# EAGLE board RC2014 I2C Bus Supervisor (EAGLE 7.1.0)
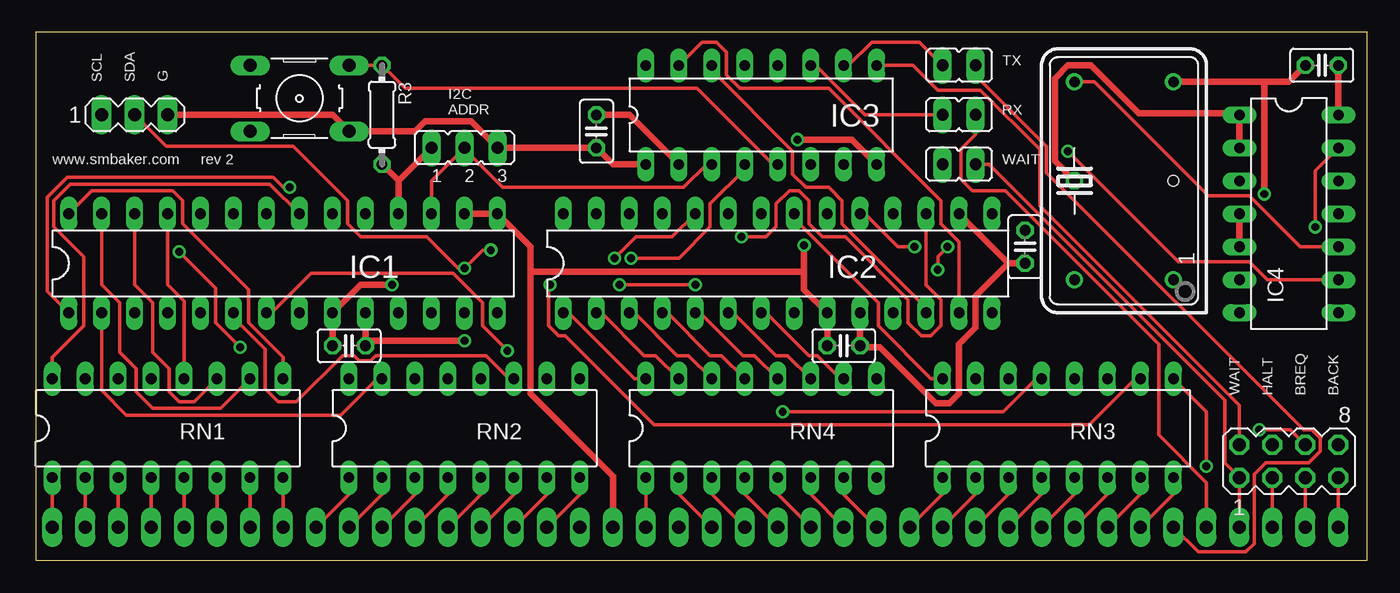
[diagram p0: board, top side]
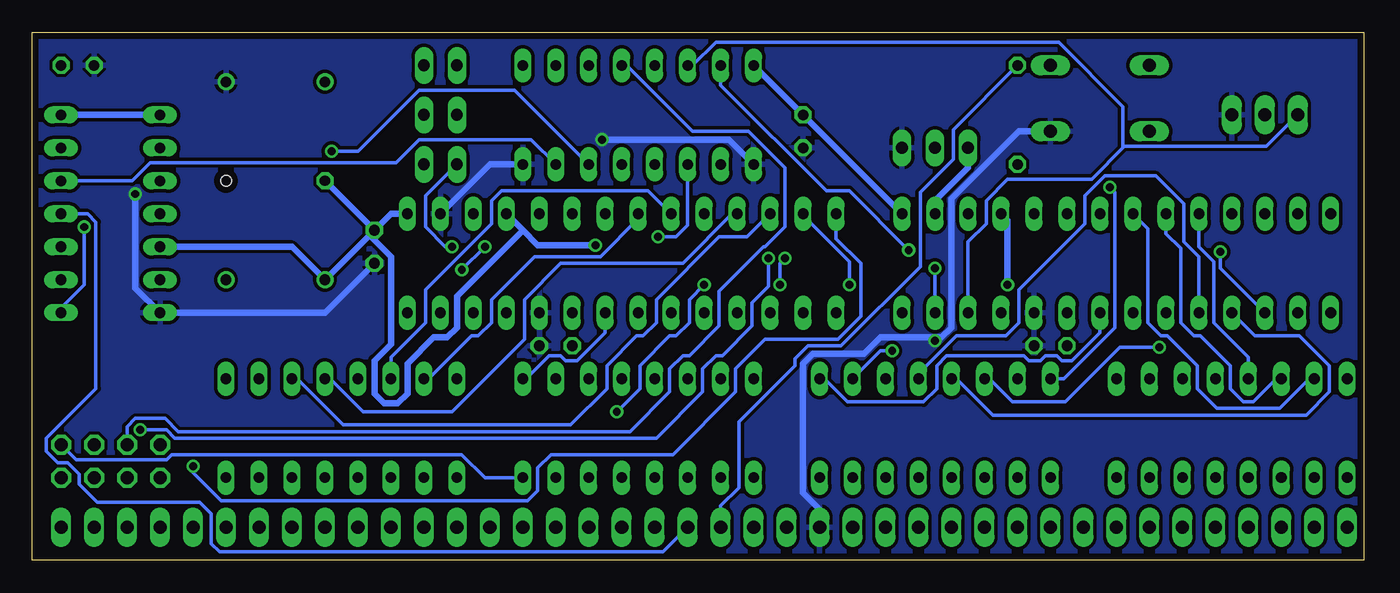
[diagram p1: board, bottom side, seen from below]

Size 102.54 x 40.63 mm. Coordinates in mm from the lower left corner, seen from the top.
Outline: 0,0 102.54,0 102.54,40.63 0,40.63 0,0
Copper layers (1*16): Top 0.035mm / dielectric 1.5mm / Bottom 0.035mm
Design rules "default *": minimum track width 10mil, minimum drill 24mil, track to track 10mil, track to pad 10mil, pad to pad 10mil, via to via 10mil, smd to smd 8mil, copper to edge 20mil, drill to drill 8mil, minimum pad ring 10mil, minimum via ring 8mil, stop-mask expansion 4mil, vias tented up to drill 25mil, thermal gap 10mil
Net classes: 1 PWR: width 0.508 mm
Holes 0.81 mm at 87.63,29.21

## Footprints (pad centres in the part's own frame; a part is rotated, then mirrored left to right if it is on the bottom)
C025-025X050 = drill 0.813 octagon: 1 -1.27,0; 2 1.27,0
DIL28-3 = drill 0.813 long: 1 -16.51,-3.81; 2 -13.97,-3.81; 3 -11.43,-3.81; 4 -8.89,-3.81; 5 -6.35,-3.81; 6 -3.81,-3.81; 7 -1.27,-3.81; 8 1.27,-3.81; 9 3.81,-3.81; 10 6.35,-3.81; 11 8.89,-3.81; 12 11.43,-3.81; 13 13.97,-3.81; 14 16.51,-3.81; 15 16.51,3.81; 16 13.97,3.81; 17 11.43,3.81; 18 8.89,3.81; 19 6.35,3.81; 20 3.81,3.81; 21 1.27,3.81; 22 -1.27,3.81; 23 -3.81,3.81; 24 -6.35,3.81; 25 -8.89,3.81; 26 -11.43,3.81; 27 -13.97,3.81; 28 -16.51,3.81
DIL16 = drill 0.813 long: 1 -8.89,-3.81; 2 -6.35,-3.81; 3 -3.81,-3.81; 4 -1.27,-3.81; 5 1.27,-3.81; 6 3.81,-3.81; 7 6.35,-3.81; 8 8.89,-3.81; 9 8.89,3.81; 10 6.35,3.81; 11 3.81,3.81; 12 1.27,3.81; 13 -1.27,3.81; 14 -3.81,3.81; 15 -6.35,3.81; 16 -8.89,3.81
DIL14 = drill 0.813 long: 1 -7.62,-3.81; 2 -5.08,-3.81; 3 -2.54,-3.81; 4 0,-3.81; 5 2.54,-3.81; 6 5.08,-3.81; 7 7.62,-3.81; 8 7.62,3.81; 9 5.08,3.81; 10 2.54,3.81; 11 0,3.81; 12 -2.54,3.81; 13 -5.08,3.81; 14 -7.62,3.81
JP2 = drill 0.914 long: 1 -2.54,0; 2 0,0; 3 2.54,0
JP1 = drill 0.914 long: 1 0,-1.27; 2 0,1.27
DIL14S = drill 0.813: 1 -7.62,-3.81; 7 7.62,-3.81; 8 7.62,3.81; 14 -7.62,3.81
0204/7 = drill 0.813 octagon: 1 -3.81,0; 2 3.81,0
MA03-1 = drill 1.016 long: 1 -2.54,0; 2 0,0; 3 2.54,0
MA04-2 = drill 1.016 octagon: 1 -3.81,-1.27; 2 -3.81,1.27; 3 -1.27,-1.27; 4 -1.27,1.27; 5 1.27,-1.27; 6 1.27,1.27; 7 3.81,-1.27; 8 3.81,1.27
SIP40 = drill 1.016 long: 1 -48.26,0; 2 -45.72,0; 3 -43.18,0; 4 -40.64,0; 5 -38.1,0; 6 -35.56,0; 7 -33.02,0; 8 -30.48,0; 9 -27.94,0; 10 -25.4,0; 11 -22.86,0; 12 -20.32,0; 13 -17.78,0; 14 -15.24,0; 15 -12.7,0; 16 -10.16,0; 17 -7.62,0; 18 -5.08,0; 19 -2.54,0; 20 0,0; 21 2.54,0; 22 5.08,0; 23 7.62,0; 24 10.16,0; 25 12.7,0; 26 15.24,0; 27 17.78,0; 28 20.32,0; 29 22.86,0; 30 25.4,0; 31 27.94,0; 32 30.48,0; 33 33.02,0; 34 35.56,0; 35 38.1,0; 36 40.64,0; 37 43.18,0; 38 45.72,0; 39 48.26,0; 40 50.8,0
BUTTON = drill 1.016 long: 1 -3.81,2.54; 2 3.81,2.54; 3 -3.81,-2.54; 4 3.81,-2.54
SMALL_TP = drill 0.8 octagon: TP 0,0

## Placement (x,y rotation side)
C1  0.1uf  [C025-025X050]  76.2,24.13 270 top
C3  0.1uf  [C025-025X050]  62.23,16.51 0 top
C4  0.1uf  [C025-025X050]  24.13,16.51 0 top
C5  0.1uf  [C025-025X050]  43.18,33.02 270 top
C6  0.1uf  [C025-025X050]  99.06,38.1 180 top
IC1  MCP23017SP  [DIL28-3]  19.05,22.86 0 top
IC2  MCP23017SP  [DIL28-3]  57.15,22.86 0 top
IC3  PCF8574P  [DIL16]  55.88,34.29 0 top
IC4  74HCT00N  [DIL14]  96.52,26.67 270 top
JP1  [JP2]  33.02,31.75 0 top
JP2  [JP1]  71.12,30.48 270 top
JP3  [JP1]  71.12,34.29 270 top
JP4  [JP1]  71.12,38.1 270 top
QG1  [DIL14S]  83.82,29.21 90 top
R3  2.2K  [0204/7]  26.67,34.29 270 top
RN1  [DIL16]  10.16,10.16 0 top
RN2  [DIL16]  33.02,10.16 0 top
RN3  [DIL16]  78.74,10.16 0 top
RN4  [DIL16]  55.88,10.16 0 top
SV1  [MA03-1]  7.62,34.29 0 top
SV3  [MA04-2]  96.52,7.62 0 top
U$1  RC2014  [SIP40]  49.53,2.54 0 top
U$2  BUTTON  [BUTTON]  20.32,35.56 0 top
U$3  SMALL_TP  [SMALL_TP]  80.01,29.21 0 top

## Library data of the parts
C1 C3-C6 R3 = resistor
IC1 IC2 = microchip; MF: MICROCHIP; MPN: MCP23017-E/SP; OC_FARNELL: 1332088; OC_NEWARK: 31K2959
IC3 = micro-philips; MPN: PCF8574PN; OC_FARNELL: 204020; OC_NEWARK: 11N8515
IC4 = 74xx-eu
JP1-JP4 = jumper
QG1 = crystal; OC_FARNELL: unknown; OC_NEWARK: unknown
RN1-RN4 = resistor-dil; OC_FARNELL: unknown; OC_NEWARK: unknown
SV1 SV3 = con-lstb; OC_FARNELL: unknown; OC_NEWARK: unknown
U$1-U$3 = scott

## Nets
+5V [PWR]: C1.1 C3.1 C4.1 C5.1 C6.1 IC1.9 IC1.15 IC1.16 IC1.18 IC2.9 IC2.15 IC2.18 IC3.2 IC3.16 IC4.1 IC4.2 IC4.4 IC4.5 IC4.14 JP1.1 QG1.14 R3.2 U$1.18 U$3.TP
A0: RN2.8 U$1.16
A1: RN2.7 U$1.15
A2: RN2.6 U$1.14
A3: RN2.5 U$1.13
A4: RN2.4 U$1.12
A5: RN2.3 U$1.11
A6: RN2.2 U$1.10
A7: RN2.1 U$1.9
A8: RN1.8 U$1.8
A9: RN1.7 U$1.7
A10: RN1.6 U$1.6
A11: RN1.5 U$1.5
A12: RN1.4 U$1.4
A13: RN1.3 U$1.3
A14: RN1.2 U$1.2
A15: RN1.1 U$1.1
BUSACK: RN4.8 SV3.8
BUSREQ: IC3.4 SV3.6
CLK: IC4.11 RN4.2 U$1.21
CLKEN: IC3.6 IC4.9
CLKOUT: IC3.7 IC4.12
CTL_INT: IC2.19 JP2.1
D0: RN3.1 U$1.27
D1: RN3.2 U$1.28
D2: RN3.3 U$1.29
D3: RN3.4 U$1.30
D4: RN3.5 U$1.31
D5: RN3.6 U$1.32
D6: RN3.7 U$1.33
D7: RN3.8 U$1.34
GND [PWR]: C1.2 C3.2 C4.2 C5.2 C6.2 IC1.10 IC2.10 IC2.16 IC3.1 IC3.8 IC4.7 JP1.3 QG1.7 SV1.3 U$1.17 U$2.4
HALT: IC3.12 SV3.4
I2CA: IC1.17 IC2.17 IC3.3 JP1.2
INT: RN4.3 U$1.22
IORQ: RN4.7 U$1.26
M1: RN4.1 U$1.19
MREQ: RN4.4 U$1.23
N$1: JP4.2 U$1.35
N$2: JP3.2 U$1.36
N$4: IC1.21 RN1.16
N$5: IC4.8 IC4.13
N$6: IC1.22 RN1.15
N$7: IC1.23 RN1.14
N$8: IC1.24 RN1.13
N$9: IC1.25 RN1.12
N$10: IC1.26 RN1.11
N$11: IC1.27 RN1.10
N$12: IC1.28 RN1.9
N$13: IC1.1 RN2.16
N$14: IC1.2 RN2.15
N$15: IC1.3 RN2.14
N$16: IC1.4 RN2.13
N$17: IC1.5 RN2.12
N$18: IC1.6 RN2.11
N$19: IC1.7 RN2.10
N$20: IC1.8 RN2.9
N$21: IC2.21 RN3.16
N$22: IC2.22 RN3.15
N$23: IC2.23 RN3.14
N$24: IC2.24 RN3.13
N$25: IC2.25 RN3.12
N$26: IC2.26 RN3.11
N$27: IC2.27 RN3.10
N$28: IC2.28 RN3.9
N$29: IC2.1 RN4.16
N$30: IC2.2 RN4.15
N$31: IC2.3 RN4.14
N$32: IC2.4 RN4.13
N$33: IC2.5 RN4.12
N$34: IC2.6 RN4.11
N$35: IC2.7 RN4.10
N$36: SV3.7 U$1.40
N$37: IC2.8 RN4.9
N$38: SV3.5 U$1.39
N$39: SV3.3 U$1.38
N$40: JP2.2 SV3.1 U$1.37
RD: RN4.6 U$1.25
RST: IC3.5 R3.1 U$1.20 U$2.2
RX: IC3.11 JP3.1
SCL: IC1.12 IC2.12 IC3.14 SV1.1
SDA: IC1.13 IC2.13 IC3.15 SV1.2
SERCLK: IC4.10 QG1.8
TX: IC3.10 JP4.1
WAIT: IC3.9 SV3.2
WR: RN4.5 U$1.24

## Tracks (layer width: path | path; a pad name or v marks a point on that pad's centre or on a via)
+5V  (via drill 0.61)
  Top 0.508: IC4.2 IC4.1 92.58,34.42 84.96,34.42 81.28,38.1 79.5,38.1 78.49,37.08 78.49,30.73 U$3.TP | C6.1 IC4.14 | IC4.4 IC4.5 | C4.1 IC1.9 25.02,21.21 v27.43,21.21 | 27.94,29.21 IC1.18 | R3.2 27.94,29.21 | 27.94,29.21 JP1.1 | C3.1 IC2.9 59.18,20.83 59.18,22.23 | 59.18,22.23 v59.18,24.26 | IC3.2 45.72,34.29 C5.1 | IC1.16 IC1.15 38.1,24.13 38.1,22.23 | U$1.18 44.45,6.48 38.1,12.83 38.1,22.23 | 38.1,22.23 59.18,22.23
  Bottom 0.508: IC4.14 IC4.1 | C1.1 U$3.TP | C1.1 QG1.14 82.55,24.13 IC4.5 | IC2.15 74.93,26.67 C1.1 | v27.43,21.21 27.43,26.16 IC1.18 | 64.77,25.4 63.63,24.26 v59.18,24.26 | 64.77,25.4 IC2.18 | IC3.16 C5.1 IC1.15 | JP1.1 30.48,30.23 33.02,27.69 IC1.16 | 64.77,25.4 69.85,20.32 69.85,17.91 70.61,17.14 71.63,17.14 73.66,15.11 73.66,12.83 74.42,12.06 75.44,12.06 76.2,12.83 76.2,15.37 74.93,16.64 74.93,23.37 76.45,24.89 C1.1
A0
  Top 0.254: RN2.8 41.91,5.08 U$1.16
A1
  Top 0.254: RN2.7 39.37,5.08 U$1.15
A2
  Top 0.254: RN2.6 36.83,5.08 U$1.14
A3
  Top 0.254: RN2.5 34.29,5.08 U$1.13
A4
  Top 0.254: RN2.4 31.75,5.08 U$1.12
A5
  Top 0.254: RN2.3 29.21,5.08 U$1.11
A6
  Top 0.254: RN2.2 26.67,5.08 U$1.10
A7
  Top 0.254: RN2.1 24.13,5.08 U$1.9
A8
  Top 0.254: U$1.8 RN1.8
A9
  Top 0.254: U$1.7 RN1.7
A10
  Top 0.254: U$1.6 RN1.6
A11
  Top 0.254: U$1.5 RN1.5
A12
  Top 0.254: U$1.4 RN1.4
A13
  Top 0.254: U$1.3 RN1.3
A14
  Top 0.254: U$1.2 RN1.2
A15
  Top 0.254: U$1.1 RN1.1
BUSACK
  Bottom 0.254: RN4.8 67.69,6.35 69.47,8.13 91.82,8.13 92.2,7.75 99.19,7.75 SV3.8
BUSREQ  (via drill 0.61)
  Top 0.254: IC3.4 54.61,30.1 51.94,27.43 51.94,25.65 49.53,23.24 v45.85,23.24 | v94.23,10.03 96.65,10.03 SV3.6
  Bottom 0.254: v45.85,23.24 45.85,21.08 47.12,19.81 47.12,18.03 49.4,15.75 49.91,15.75 50.93,14.73 50.93,12.95 54.48,9.4 91.57,9.4 92.2,10.03 v94.23,10.03
CLK
  Top 0.254: RN4.2 49.53,5.08 U$1.21
  Bottom 0.254: IC4.11 98.3,26.67 97.66,26.04 97.66,13.21 101.47,9.4 101.47,8.38 100.58,7.49 99.82,7.49 98.93,6.6 98.93,5.84 97.54,4.45 89.66,4.45 88.77,3.56 88.77,1.27 88.14,0.64 53.98,0.64 U$1.21
CLKEN  (via drill 0.61)
  Top 0.254: IC4.9 94.87,21.59 93.47,22.99 88.01,22.99 v79.5,31.5
  Bottom 0.254: v79.5,31.5 77.47,31.5 72.77,36.2 65.41,36.2 IC3.6
CLKOUT
  Bottom 0.254: IC4.12 94.87,29.21 93.47,30.61 74.55,30.61 72.77,32.38 64.14,32.38 IC3.7
CTL_INT  (via drill 0.61)
  Top 0.254: IC2.19 63.88,26.67 66.42,24.13 v67.69,24.13 | v69.47,22.35 69.47,23.37 v70.23,24.13
  Bottom 0.254: v69.47,22.35 v67.69,24.13 | v70.23,24.13 70.74,24.13 72.26,25.65 72.26,28.07 JP2.1
D0
  Top 0.254: RN3.1 69.85,5.08 U$1.27
D1
  Top 0.254: RN3.2 72.39,5.08 U$1.28
D2
  Top 0.254: RN3.3 74.93,5.08 U$1.29
D3
  Top 0.254: RN3.4 77.47,5.08 U$1.30
D4
  Top 0.254: RN3.5 80.01,5.08 U$1.31
D5
  Top 0.254: RN3.6 82.55,5.08 U$1.32
D6
  Top 0.254: RN3.7 85.09,5.08 U$1.33
D7
  Top 0.254: RN3.8 87.63,5.08 U$1.34
GND  (via drill 0.61)
  Top 0.508: 94.61,36.83 96.52,36.83 C6.2 | 94.61,36.83 QG1.7 | IC2.10 C3.2 63.63,16.38 65.02,16.38 69.34,12.06 70.36,12.06 71.12,12.83 71.12,16.64 72.39,17.91 72.39,20.32 74.93,22.86 | 74.93,22.86 C1.2 | IC2.16 74.93,22.86 | v94.61,28.19 94.61,36.83 | IC1.10 C4.2 25.53,16.89 v33.02,16.89 | IC3.1 44.45,30.48 C5.2 JP1.3 33.53,33.78 29.97,33.78 29.21,33.02 U$2.4 22.86,34.29 SV1.3 | IC3.8 62.87,32.38 v58.67,32.38
  Bottom 0.508: C1.2 80.01,19.05 IC4.7 94.61,20.95 v94.61,28.19 | IC3.8 67.31,30.48 IC2.16 | U$1.17 41.91,3.94 43.18,5.21 43.18,15.11 42.42,15.88 38.48,15.88 37.21,17.14 33.02,17.14 | 33.02,17.14 32.51,17.14 31.75,17.91 31.75,27.81 26.54,33.02 U$2.4 | v33.02,16.89 33.02,17.14 | v58.67,32.38 48.9,32.38 IC3.1
  pour Bottom: 0,0 0,40.64 102.87,40.64 102.87,0
HALT
  Bottom 0.254: IC3.12 56.77,38.1 51.69,33.02 47.37,33.02 44.58,30.23 44.58,25.65 46.1,24.13 46.23,24.13 49.66,20.7 49.66,18.03 51.94,15.75 52.45,15.75 53.47,14.73 53.47,12.95 56.52,9.91 91.31,9.91 92.33,10.92 94.61,10.92 95.25,10.29 SV3.4
I2CA  (via drill 0.61)
  Top 0.254: IC1.17 30.48,29.21 JP1.2 33.02,31.62 35.94,28.7 49.91,28.7 51.69,30.48 IC3.3 | IC2.17 68.58,21.21 69.72,20.07 69.72,18.03 68.96,17.27 68.2,17.27 67.18,18.29 67.18,20.07 62.36,24.89 60.58,24.89 59.56,25.91 59.56,27.69 58.8,28.45 58.04,28.45 57.02,27.43 57.02,25.65 56.26,24.89 v54.36,24.89
  Bottom 0.254: v54.36,24.89 52.96,24.89 52.07,25.78 IC3.3
INT
  Top 0.254: RN4.3 52.07,5.08 U$1.22
IORQ
  Top 0.254: RN4.7 62.23,5.08 U$1.26
M1
  Top 0.254: U$1.19 RN4.1
MREQ
  Top 0.254: RN4.4 54.61,5.08 U$1.23
N$1
  Top 0.254: JP4.2 72.39,37.34 77.85,31.88 77.85,29.84 97.66,10.03 98.3,10.03 98.93,9.4 98.93,8.38 98.04,7.49 94.74,7.49 93.85,6.6 93.85,1.27 93.22,0.64 89.53,0.64 U$1.35
N$2
  Top 0.254: JP3.2 72.39,32.77 71.25,31.62 71.25,29.34 72.14,28.45 74.68,28.45 86.49,16.64 86.49,9.65 90.17,5.97 U$1.36
N$4
  Top 0.254: RN1.16 1.27,15.62 3.68,18.03 3.68,23.37 1.4,25.65 1.4,27.69 2.67,28.96 18.03,28.96 IC1.21
N$5  (via drill 0.61)
  Top 0.254: v98.55,25.65 98.55,29.97 IC4.13
  Bottom 0.254: IC4.8 100.33,19.43 98.55,21.21 v98.55,25.65
N$6
  Bottom 0.254: RN1.15 4.19,13.97 6.48,11.68 11.3,11.68 12.83,13.21 12.83,14.99 15.11,17.27 15.62,17.27 16.64,18.29 16.64,25.53 IC1.22
N$7
  Bottom 0.254: RN1.14 6.73,13.97 8.51,12.19 9.27,12.19 10.29,13.21 10.29,14.99 12.57,17.27 13.08,17.27 14.1,18.29 14.1,24 15.24,25.15 IC1.23
N$8
  Bottom 0.254: RN1.13 8.89,15.62 11.56,18.29 11.56,22.99 12.7,24.13 IC1.24
N$9
  Top 0.254: IC1.25 10.16,21.21 11.43,19.94 RN1.12
N$10
  Top 0.254: IC1.26 7.62,21.21 9.02,19.81 9.02,16 10.29,14.73 10.29,12.95 11.05,12.19 12.19,12.19 RN1.11
N$11
  Top 0.254: IC1.27 5.08,21.21 6.48,19.81 6.48,16 7.75,14.73 7.75,12.95 9.02,11.68 14.22,11.68 RN1.10
N$12
  Top 0.254: RN1.9 19.05,15.62 16.38,18.29 16.38,20.83 11.3,25.91 11.3,27.69 10.54,28.45 4.32,28.45 IC1.28
N$13  (via drill 0.61)
  Top 0.254: v19.56,28.7 19.05,28.7 18.29,29.46 2.41,29.46 0.89,27.94 0.89,20.7 IC1.1
  Bottom 0.254: RN2.16 23.11,13.97 19.18,17.91 19.18,28.32 v19.56,28.7
N$14
  Top 0.254: RN2.15 26.29,13.97 23.5,11.18 6.99,11.18 5.08,13.08 IC1.2
N$15  (via drill 0.61)
  Top 0.254: v15.75,16.38 13.84,18.29 13.84,20.95 v11.05,23.75
  Bottom 0.254: RN2.14 28.83,13.97 27.05,12.19 22.99,12.19 18.8,16.38 v15.75,16.38 | v11.05,23.75 11.05,22.48 IC1.3
N$16
  Bottom 0.254: RN2.13 31.37,13.97 28.57,11.18 4.45,11.18 2.67,12.95 2.67,14.99 4.95,17.27 8.38,17.27 IC1.4
N$17
  Bottom 0.254: RN2.12 34.29,14.35 31.37,17.27 27.56,17.27 26.54,18.29 26.54,20.83 21.46,25.91 21.46,28.07 19.94,29.59 16,29.59 13.84,27.43 13.84,24.51 12.7,23.37 IC1.5
N$18
  Top 0.254: RN2.11 36.45,13.97 34.67,15.75 26.16,15.75 25.78,15.37 24.89,15.37 24.51,15.75 23.62,15.75 20.07,12.19 18.67,12.19 17.65,13.21 17.65,16.26 15.24,18.67 IC1.6
N$19  (via drill 0.61)
  Top 0.254: IC1.7 18.16,19.05 21.21,22.1 32.13,22.1 34.42,19.81 34.42,18.03 v36.32,16.13
  Bottom 0.254: v36.32,16.13 37.21,16.13 RN2.10
N$20
  Bottom 0.254: RN2.9 41.53,13.97 39.75,12.19 33.91,12.19 32.89,13.21 32.89,14.99 32.13,15.75 26.16,15.75 25.78,15.37 24.89,15.37 24.51,15.75 23.62,15.75 23.24,15.37 22.48,15.37 20.32,17.53 IC1.8
N$21
  Top 0.254: IC2.21 58.42,26.29 64.9,19.81 64.9,18.03 68.96,13.97 RN3.16
N$22
  Bottom 0.254: RN3.15 72.01,13.97 68.71,17.27 68.2,17.27 67.18,18.29 67.18,20.07 63.88,23.37 58.8,23.37 55.88,26.29 IC2.22
N$23
  Bottom 0.254: RN3.14 74.93,15.62 72.26,18.29 72.26,20.83 67.18,25.91 67.18,27.69 66.42,28.45 55.12,28.45 IC2.23
N$24  (via drill 0.61)
  Top 0.254: RN3.13 77.09,13.97 74.55,11.43 v57.53,11.43 | v44.96,21.21 v50.8,21.21 | v44.58,23.24 46.23,24.89 49.02,24.89 IC2.24
  Bottom 0.254: v57.53,11.43 55.75,13.21 55.75,14.99 53.47,17.27 52.96,17.27 51.94,18.29 51.94,20.07 v50.8,21.21 | v44.96,21.21 44.96,22.86 v44.58,23.24
N$25
  Bottom 0.254: RN3.12 79.63,13.97 77.09,11.43 70.23,11.43 64.64,17.02 64.64,20.07 61.85,22.86 52.45,22.86 48.64,26.67 IC2.25
N$26
  Bottom 0.254: RN3.11 82.17,13.97 78.61,10.41 61.09,10.41 58.29,13.21 58.29,14.99 56.01,17.27 55.5,17.27 54.48,18.29 54.48,20.07 49.66,24.89 47.5,24.89 IC2.26
N$27  (via drill 0.61)
  Top 0.254: RN3.10 84.71,13.97 81.15,10.41 47.62,10.41 40.77,17.27 40.26,17.27 39.5,18.03 39.5,21.08 v39.62,21.21
  Bottom 0.254: v39.62,21.21 39.62,22.99 43.18,26.54 IC2.27
N$28  (via drill 0.61)
  Top 0.254: v90.17,7.24 90.17,11.43 RN3.9
  Bottom 0.254: IC2.28 40.64,24.77 38.73,22.86 38.73,18.8 40.51,17.02 46.1,17.02 48.39,14.73 48.39,12.95 53.21,8.13 62.61,8.13 63.63,7.11 63.63,5.33 64.39,4.57 88.01,4.57 90.17,6.73 v90.17,7.24
N$29
  Top 0.254: IC2.1 41.02,19.05 46.1,13.97 RN4.16
N$30
  Top 0.254: IC2.2 43.56,19.05 46.86,15.75 47.75,15.75 RN4.15
N$31
  Top 0.254: IC2.3 46.1,19.05 49.4,15.75 50.29,15.75 RN4.14
N$32
  Top 0.254: IC2.4 48.64,19.05 51.94,15.75 52.83,15.75 RN4.13
N$33
  Top 0.254: IC2.5 51.18,19.05 54.48,15.75 55.37,15.75 RN4.12
N$34
  Top 0.254: IC2.6 53.72,19.05 57.02,15.75 57.91,15.75 RN4.11
N$35
  Top 0.254: IC2.7 56.26,19.05 59.56,15.75 60.2,15.75 61.98,13.97 RN4.10
N$36
  Top 0.254: SV3.7 U$1.40
N$37
  Bottom 0.254: IC2.8 58.42,17.53 60.58,15.37 61.47,15.37 61.85,15.75 62.74,15.75 64.52,13.97 RN4.9
N$38
  Top 0.254: SV3.5 U$1.39
N$39
  Top 0.254: SV3.3 U$1.38
N$40
  Top 0.254: JP2.2 73.41,30.48 91.57,12.32 91.57,7.49 SV3.1 U$1.37
RD
  Top 0.254: RN4.6 59.69,5.08 U$1.25
RST
  Top 0.254: U$2.2 R3.1 28.45,36.32 50.93,36.32 56.77,30.48 IC3.5
  Bottom 0.254: U$1.20 49.53,4.19 48.13,5.59 48.13,10.67 43.81,14.99 43.81,15.49 42.8,16.51 40.26,16.51 34.16,22.61 34.16,28.32 31.62,30.86 31.62,33.15 R3.1
RX
  Top 0.254: IC3.11 60.07,38.1 63.88,34.29 JP3.1
SCL
  Top 0.254: IC2.12 68.58,19.43 62.1,25.91 62.1,27.69 61.09,28.7 59.31,28.7 58.29,29.72 58.29,31.5 52.07,37.72 IC3.14
  Bottom 0.254: IC1.12 30.48,24.51 29.08,25.91 29.08,27.69 27.43,29.34 20.95,29.34 18.48,31.81 | 18.48,31.81 18.41,31.88 7.49,31.88 SV1.1 | IC3.14 51.69,38.1 49.91,39.88 23.5,39.88 18.54,34.92 18.54,31.88 18.48,31.81
SDA  (via drill 0.61)
  Top 0.254: IC2.13 71.12,24.51 69.72,25.91 69.72,27.69 61.09,36.32 54.23,36.32 53.21,37.34 53.21,39.12 52.45,39.88 51.31,39.88 IC3.15 | SV1.2 10.03,31.88 19.81,31.88 24,27.69 24,25.91 25.02,24.89 30.1,24.89 32.51,22.48 v33.02,22.48 34.42,23.88 v35.05,23.88
  Bottom 0.254: v33.02,22.48 IC1.13 | IC3.15 49.53,36.58 41.4,28.45 39.62,28.45 v35.05,23.88
SERCLK
  Top 0.254: IC4.10 97.41,24.13 93.47,28.07 90.3,28.07 81.53,36.83 QG1.8
TX
  Top 0.254: IC3.10 62.61,38.1 64.39,39.88 68.07,39.88 JP4.1
WAIT
  Top 0.254: IC3.9 67.56,38.1 69.47,36.2 72.77,36.2 77.34,31.62 77.34,27.3 92.71,11.94 SV3.2
WR
  Top 0.254: RN4.5 57.15,5.08 U$1.24

## Text on the board
tPlace: TX | SCL | SDA | G | I2C / ADDR | RX | www.smbaker.com | rev 2 | WAIT | WAIT | HALT | BREQ | BACK